# EAGLE board PortalsPanel (EAGLE 9.6.2)
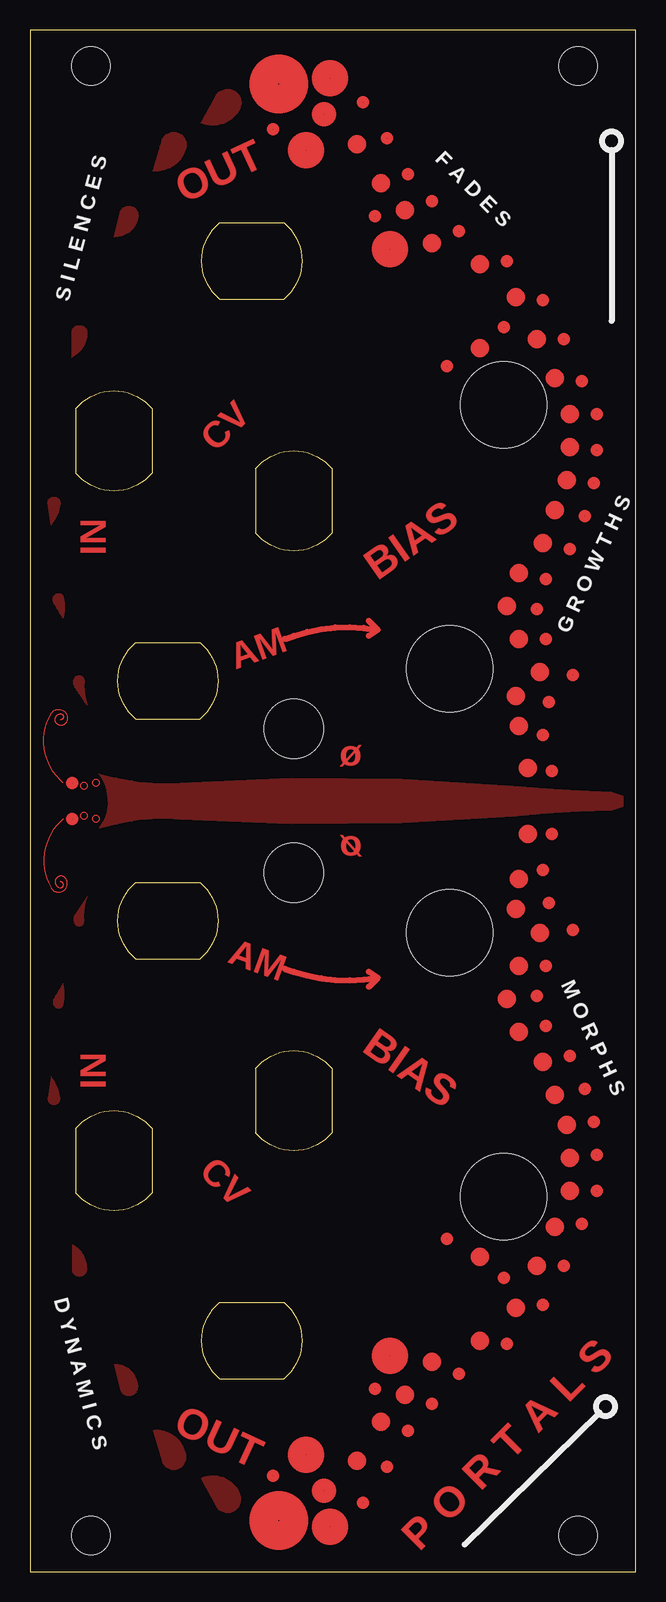
[diagram p0: board, top side]
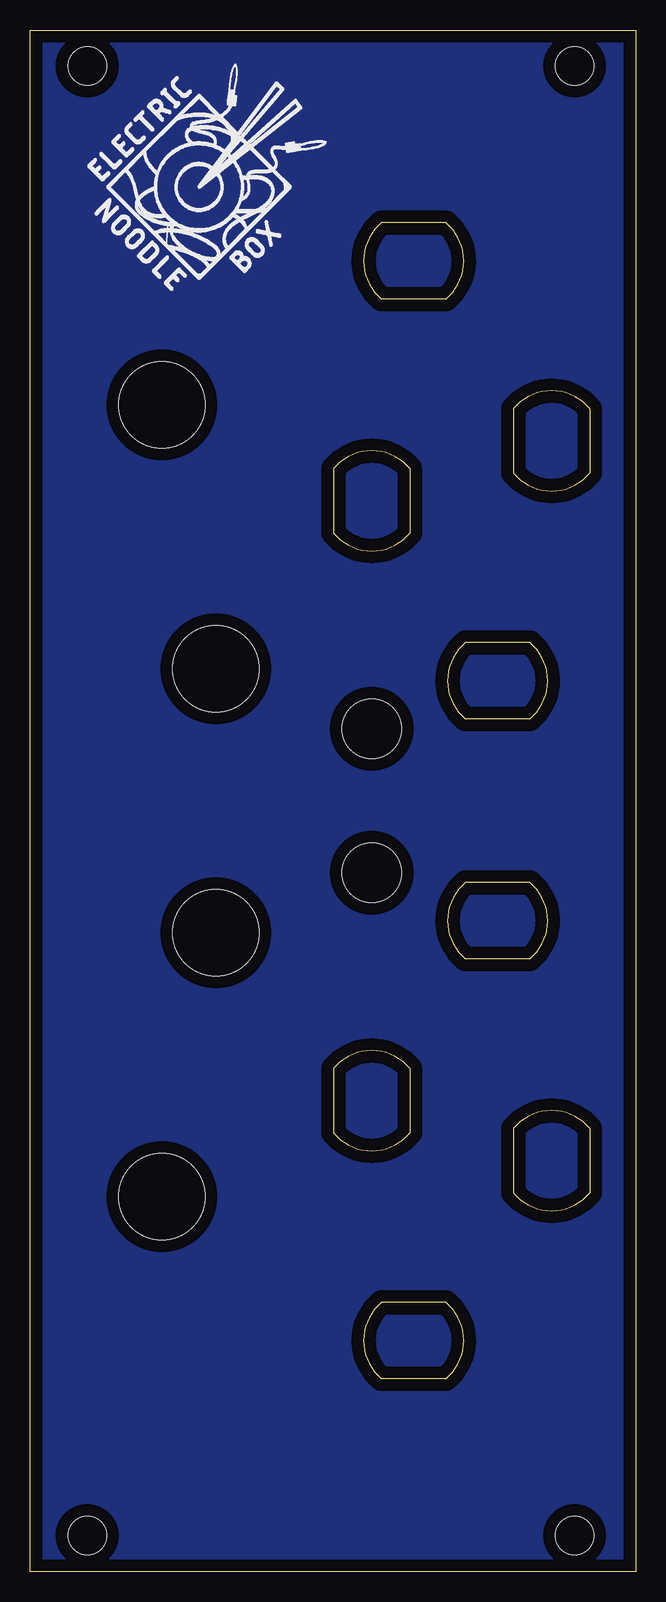
[diagram p1: board, bottom side, seen from below]

Size 50.5 x 128.5 mm. Coordinates in mm from the lower left corner, seen from the top.
Outline: 0,0 50.5,0 50.5,128.5 0,128.5 0,0
Copper layers (1*16): Top 0.035mm / dielectric 1.5mm / Bottom 0.035mm
Design rules "default": minimum track width 6mil, minimum drill 0.35mm, track to track 6mil, track to pad 6mil, pad to pad 6mil, via to via 6mil, smd to smd 6mil, copper to edge 40mil, drill to drill 6mil, minimum pad ring 10mil, minimum via ring 8mil, stop-mask expansion 4mil, vias tented up to drill 0mil, thermal gap 10mil
Holes 3.2 mm at 5.08,3 45.72,3 5.08,125.5 45.72,125.5

## Footprints (pad centres in the part's own frame; a part is rotated, then mirrored left to right if it is on the bottom)
DW1_SWITCH_CUTOUT = hole 4.95: 0,0
ALPHA9MM_POT_CUTOUT = hole 7.2: 0,0

## Placement (x,y rotation side)
E$1  [CINCH_BANANA_CUTOUT]  18.5,109.25 90 top
E$2  [CINCH_BANANA_CUTOUT]  7,94.25 0 top
E$3  [CINCH_BANANA_CUTOUT]  22,89.25 0 top
E$4  [CINCH_BANANA_CUTOUT]  11.5,74.25 90 top
E$5  [CINCH_BANANA_CUTOUT]  11.5,54.25 90 top
E$6  [CINCH_BANANA_CUTOUT]  7,34.25 0 top
E$7  [CINCH_BANANA_CUTOUT]  22,39.25 0 top
E$8  [CINCH_BANANA_CUTOUT]  18.5,19.25 90 top
E$9  [DW1_SWITCH_CUTOUT]  22,70.25 0 top
E$10  [DW1_SWITCH_CUTOUT]  22,58.25 0 top
E$11  [ALPHA9MM_POT_CUTOUT]  39.5,97.25 0 top
E$12  [ALPHA9MM_POT_CUTOUT]  35,75.25 0 top
E$13  [ALPHA9MM_POT_CUTOUT]  35,53.25 0 top
E$14  [ALPHA9MM_POT_CUTOUT]  39.5,31.25 0 top
E$15  [LOGO20X20]  45.75,106.25 0 bottom

## Library data of the parts
E$1-E$15 = ElectricNoodleBox

## Tracks (layer width: path | path; a pad name or v marks a point on that pad's centre or on a via)
BODY
  pour Top: 5.75,66.5 6.75,66.25 arc18 12.5,65.75 arc-9 40.25,65.5 arc3 48.5,65 50.75,64.25 6.5,64.25 6.5,64.5 arc41
BODY1
  pour Top: 5.75,62 6.75,62.25 arc-18 12.5,62.75 arc9 40.25,63 arc-3 48.5,63.5 50.75,64.25 6.5,64.25 6.5,64 arc-41
CREST4
  pour Top: 15,64.5 14.25,64.5 arc-19 12.75,64.75 arc30 9,65 arc67 8.25,64.25 16,64.25
CREST5
  pour Top: 15,64 14.25,64 arc19 12.75,63.75 arc-30 9,63.5 arc-67 8.25,64.25 16,64.25
CREST6
  pour Top: 15,64.5 14.25,64.5 arc-19 12.75,64.75 arc30 9,65 arc67 8.25,64.25 16,64.25
CREST7
  pour Top: 15,64 14.25,64 arc19 12.75,63.75 arc-30 9,63.5 arc-67 8.25,64.25 16,64.25
GND
  pour Bottom: 0,0 50.5,0 50.5,128.5 0,128.5
S$1
  pour Top: 14.25,120.75 15.5,123 arc-175 17.5,122 arc-90
S$2
  pour Top: 10.25,116.75 11,119.25 arc-175 13,118.75 arc-85
S$3
  pour Top: 7,111.25 7.5,113.25 arc-171 9,113 arc-88
S$4
  pour Top: 3.5,101.25 3.5,103.25 arc-180 4.75,103.25 arc-64
S$5
  pour Top: 1.75,87.25 1.5,89 arc-196 2.5,89 arc-30
S$6
  pour Top: 2.75,79.5 2,80.75 arc-99 2.25,81.5 arc-97 2.75,81.25 arc-29
S$7
  pour Top: 4.75,72.25 3.75,73.75 arc-67 3.75,74.5 arc-149 4.5,74.25 arc21
S$8
  Top 0.1: 2.75,65.75 2.5,66
S$9
  Top 0.1: 2.5,66 arc-74 1.75,71.5
S$10
  Top 0.1: 1.75,71.5 arc-183 3,70.75
S$11
  Top 0.1: 3,70.75 arc-228 2.5,71.5
S$12
  Top 0.1: 2.5,71.5 arc-200 2.5,71
S$13
  Top 0.1: 2.75,62.75 2.5,62.5
S$14
  Top 0.1: 2.5,62.5 arc74 1.75,57
S$15
  Top 0.1: 1.75,57 arc183 3,57.75
S$16
  Top 0.1: 3,57.75 arc228 2.5,57
S$17
  Top 0.1: 2.5,57 arc200 2.5,57.5
S$18
  pour Top: 4.75,56.25 3.75,54.75 arc67 3.75,54 arc149 4.5,54.25 arc-21
S$19
  pour Top: 2.75,49 2,47.75 arc99 2.25,47 arc97 2.75,47.25 arc29
S$20
  pour Top: 1.75,41.25 1.5,39.5 arc196 2.5,39.5 arc30
S$21
  pour Top: 3.5,27.25 3.5,25.25 arc180 4.75,25.25 arc64
S$22
  pour Top: 7,17.25 7.5,15.25 arc171 9,15.5 arc88
S$23
  pour Top: 10.25,11.75 11,9.25 arc175 13,9.75 arc85
S$24
  pour Top: 14.25,7.75 15.5,5.5 arc175 17.5,6.5 arc90
S$25
  Top 0.508: 21.25,77.75 22,78
S$26
  Top 0.508: 22,78 arc-29 29,78.5
S$27
  Top 0.508: 28.25,79.25 29,78.5
S$28
  Top 0.508: 29,78.5 28.25,78
S$29
  Top 0.508: 21.25,50.25 22,50
S$30
  Top 0.508: 22,50 arc29 29,49.5
S$31
  Top 0.508: 28.25,48.75 29,49.5
S$32
  Top 0.508: 29,49.5 28.25,50
(copper drawn outside any net)
  shapes: Top circle x108

## Text on the board
Top: OUT | CV | IN | BIAS | AM | ø | ø | AM | IN | BIAS | CV | OUT | P O R T A L S
tPlace: F A D E S | S I L E N C E S | G R O W T H S | M O R P H S | D Y N A M I C S
tStop: P O R T A L S